# Altium PCB ECE453.PcbDoc
Units mil, origin at the board's own origin, x right, y up, seen from the top; angles counter-clockwise.
Board outline 3937.01 x 3937.01 mil, 2 copper layers (Top Layer, Bottom Layer); 50 components, 33 nets, 116 pads, 68 vias.
Unrouted connection lines stored in the file: 41.
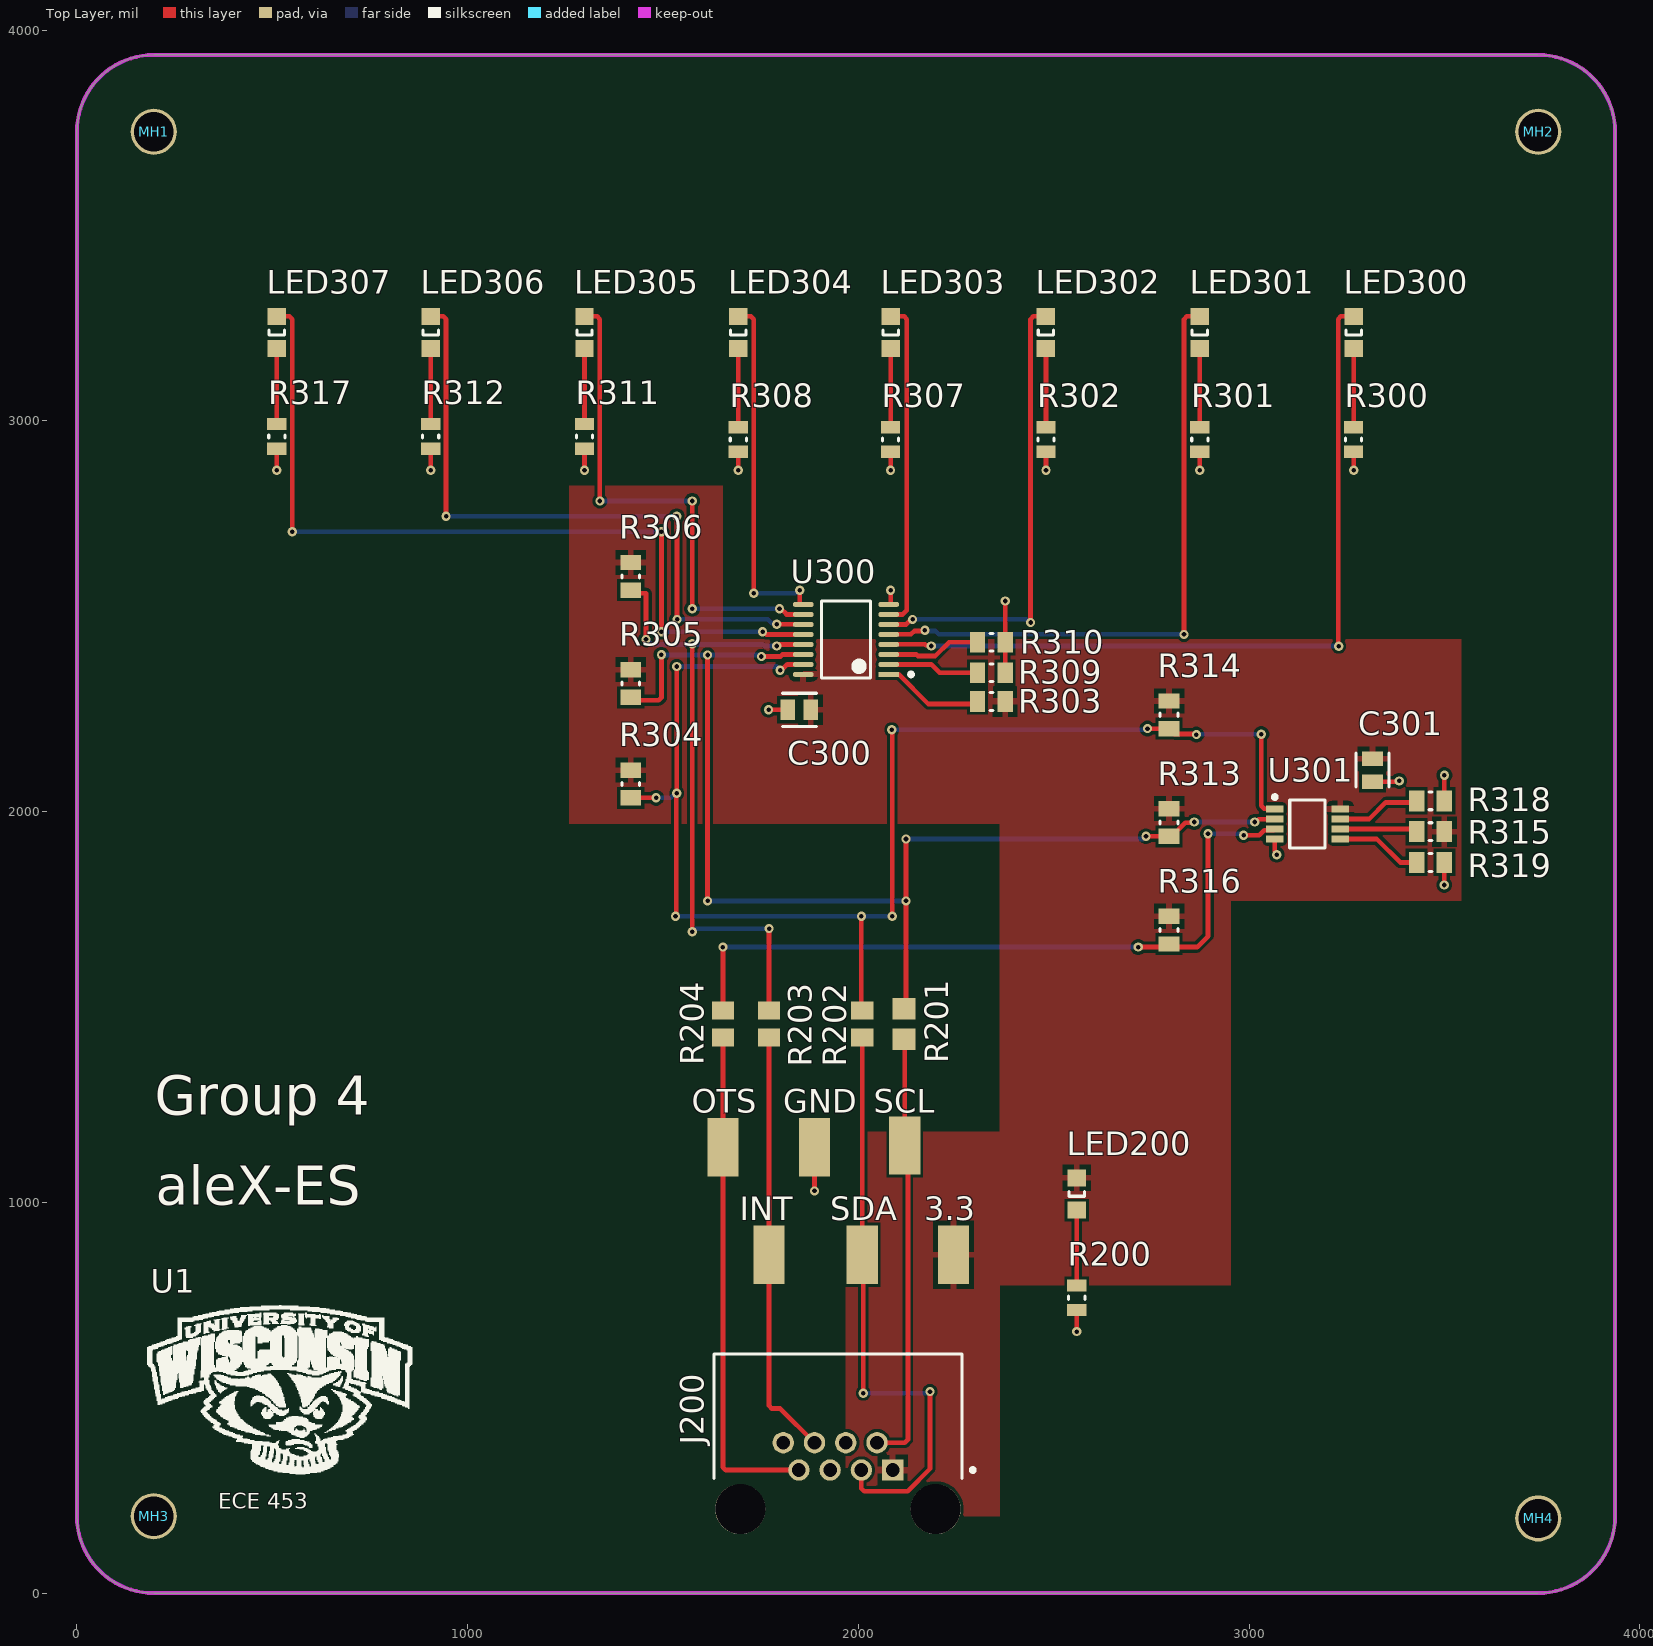
[diagram p0: Top Layer view]
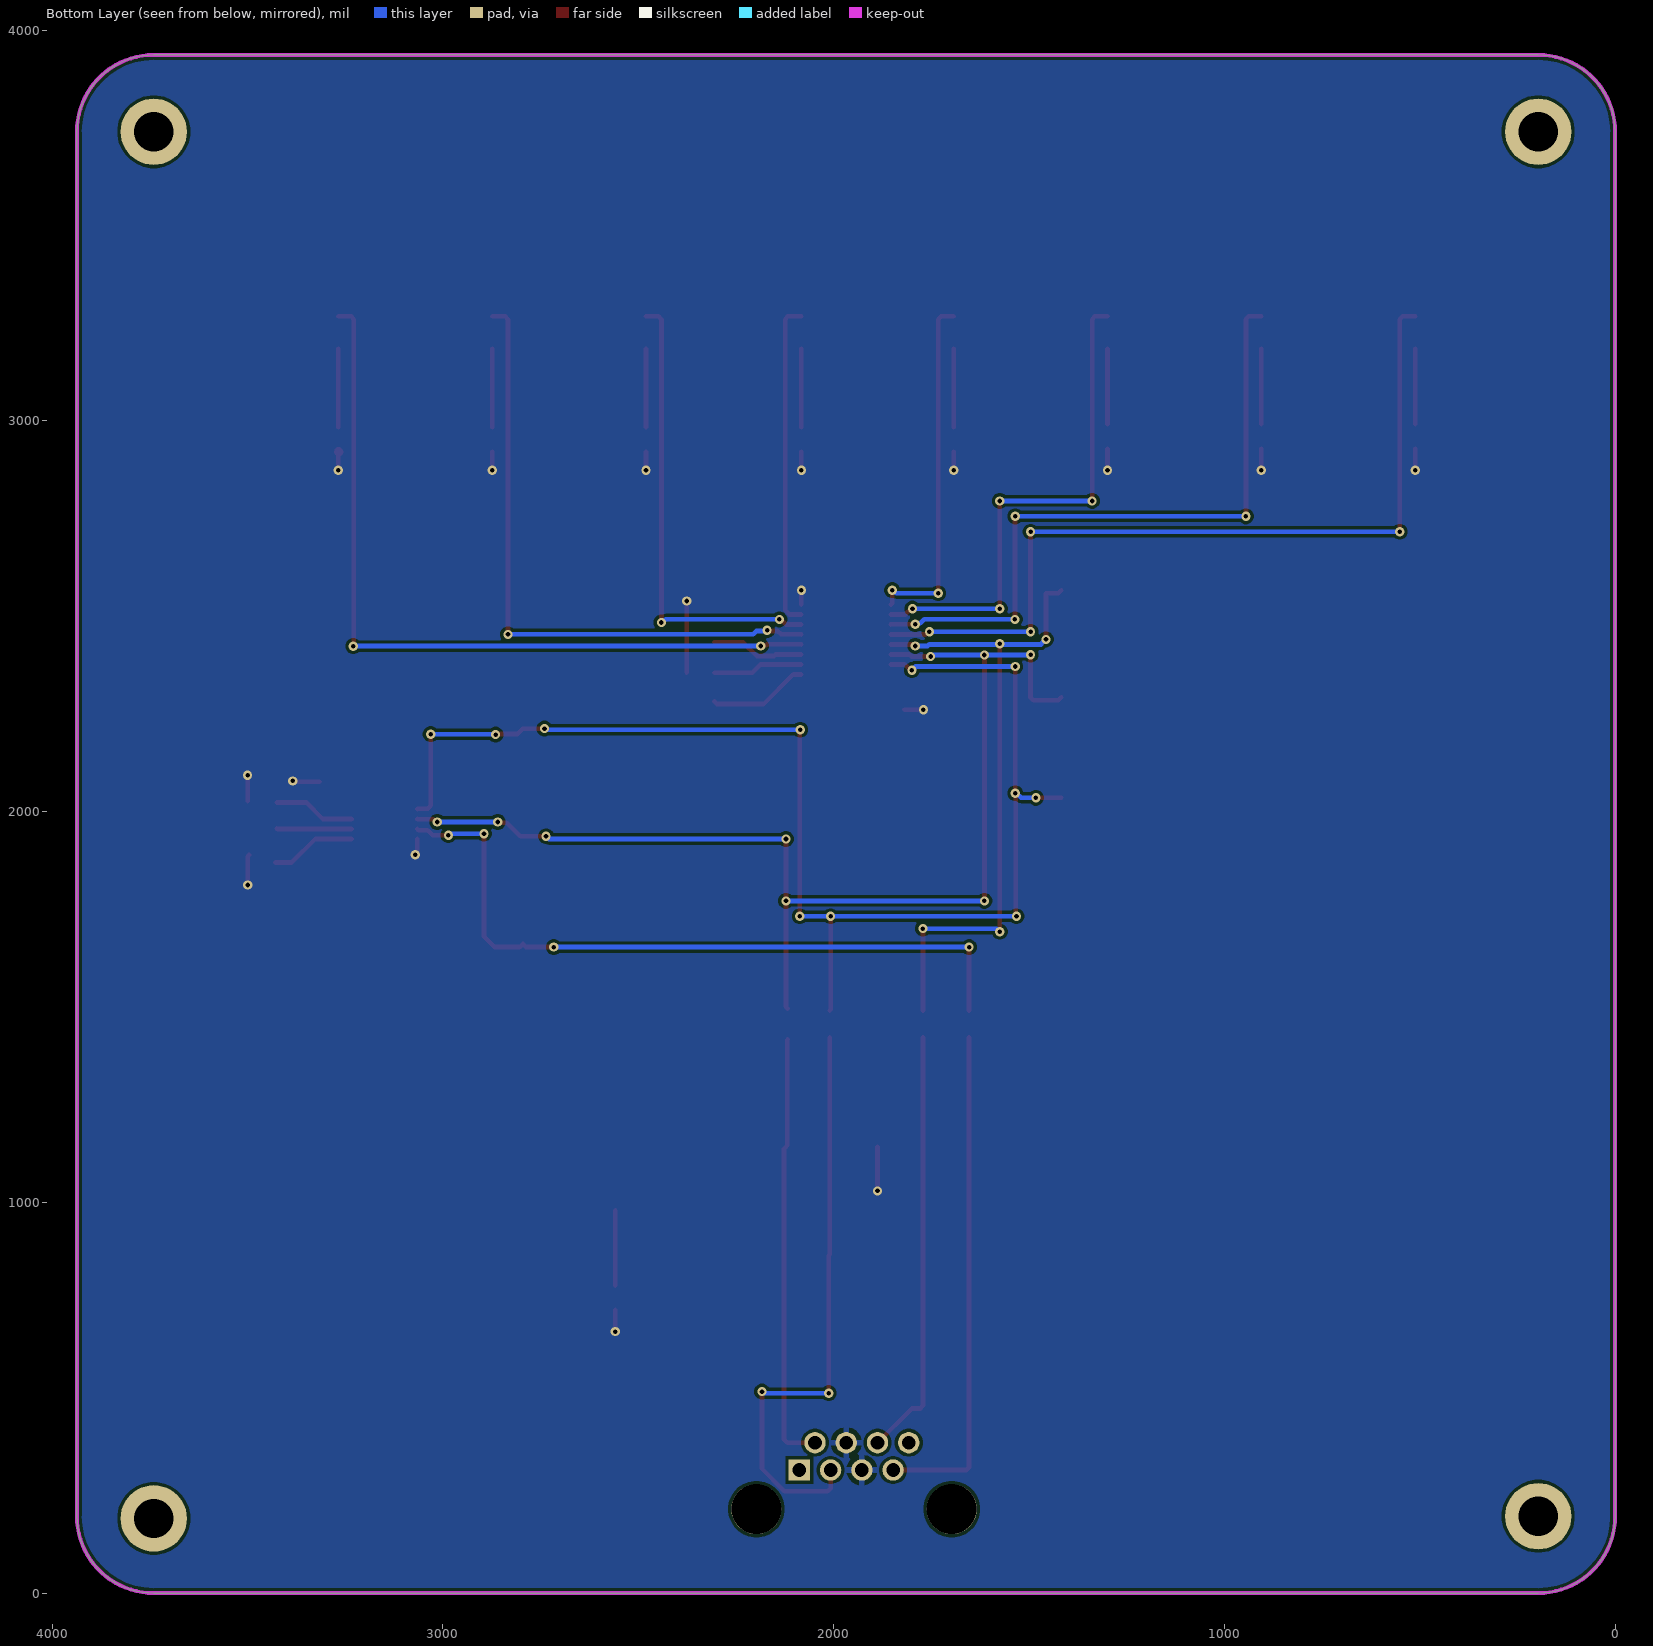
[diagram p1: Bottom Layer view, seen from below]
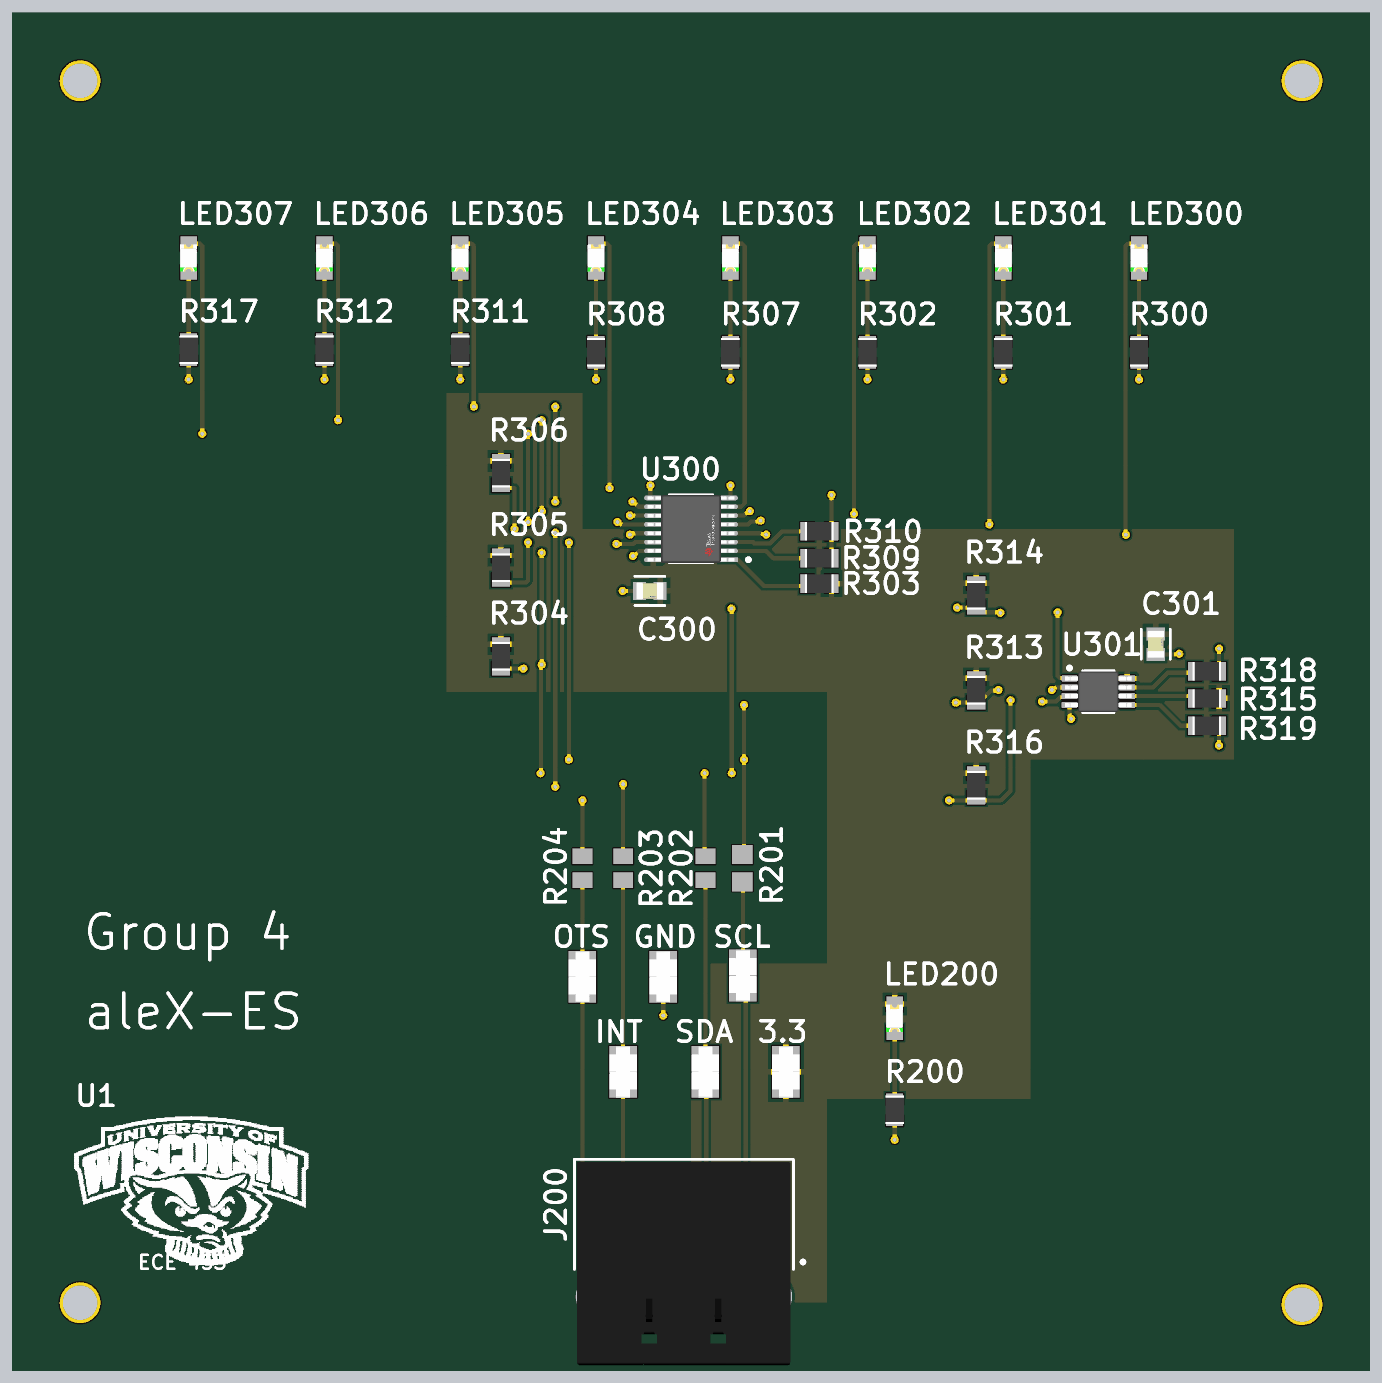
[diagram p2: 3D render of the assembled board from above, using the file's embedded part models]

## Layer stack, top to bottom
Top Solder: solder mask 0.4, Solder Resist, Dk 3.5
Top Layer: signal copper 1.4
Dielectric1: dielectric 12.6, FR-4, Dk 4.8
Bottom Layer: signal copper 1.4
Bottom Solder: solder mask 0.4, Solder Resist, Dk 3.5

## Board outline
0,196.85 ccw(c196.85,196.85) 196.85,0 3740.16,0 ccw(c3740.16,196.85) 3937.01,196.85 3937.01,3740.16 ccw(c3740.16,3740.16) 3740.16,3937.01 196.85,3937.01 ccw(c196.85,3740.16) 0,3740.16

## Design rules (kind name [scope] priority, off if disabled: settings)
Clearance Polygon_Clearance [All vs InPolygon] p1: gap=7.87 ignorepadtopadclearanceinfootprint=FALSE
Clearance [All] p2: gap=7.87 ignorepadtopadclearanceinfootprint=TRUE
ComponentClearance [InComponent('U3')] p1: gap=0 collisioncheckmode=3 verticalgap=10 showdistances=FALSE
Height [All] p1: minheight=0 maxheight=2952.76 prefheight=500
HoleSize [All] p1: absolutevalues=TRUE maxlimit=250 minlimit=11.81 maxpercent=80.000 minpercent=20.000
MinimumAnnularRing [All] p1: minimumring=5.91
MinimumSolderMaskSliver [All] p1: minsoldermaskwidth=8.66
NetAntennae NetAntennae_5.0V [InNet('5.0V')] p1: netantennaetolerance=0
NetAntennae NetAntennae_3.3V [InNet('3.3V')] p2: netantennaetolerance=0
PlaneClearance [All] p1: clearance=11.81
PlaneConnect [All] p1: planeconnectstyle=Relief reliefexpansion=11.81 reliefentries=4 reliefconductorwidth=11.81 reliefairgap=11.81
PolygonConnect ViaConnect [All vs IsVia] p1: connectstyle=Direct reliefconductorwidth=15 reliefentries=4 polygonreliefangle="90 Angle" airgapwidth=10
PolygonConnect [All] p2: connectstyle=Relief reliefconductorwidth=15.75 reliefentries=4 polygonreliefangle="90 Angle" airgapwidth=11.81
RoutingVias [All] p1: holewidth=11.81 width=23.62 viastyle="Through Hole" minholewidth=11.81 minwidth=23.62 maxholewidth=196.85 maxwidth=393.7
SilkToSilkClearance [All] p1: silktosilkclearance=0
SilkToSolderMaskClearance [IsPad] p1: minsilkscreentomaskgap=0 clearancetoexposedcopper=TRUE
SolderMaskExpansion [All] p1: expansion=4 istentingtop=FALSE
UnConnectedPin [All] p1:
Width [All] p1: maxlimit=393.7 minlimit=7.87 preferedwidth=23.62
21 further rules are at their usual default settings.

## Classes and differential pairs
component class 04_Mechanical: MH1 MH2 MH3 MH4 U1

## Components (designator, comment, footprint, x,y, rotation, side; value= is the part's Value field where it differs from the comment)
3.3 "5019" KSTN-5019_V 2243.68,866.14 r90 top
C300 "C0805C104K5RACTU" FP-C0805C-DN-MFG 1849.09,2260.78 r180 top value=100nF
C301 "C0805C104K5RACTU" FP-C0805C-DN-MFG 3316.08,2106.3 r270 top value=100nF
GND "5019" KSTN-5019_V 1887.87,1141.73 r90 top
INT "5019" KSTN-5019_V 1771.65,866.14 r90 top
J200 "RJHSE-5080" FP-RJHSE-5080-MFG 1947.87,309.96 r0 top
LED200 "150080GS75000" 0805_A 2559.06,1021.65 r90 top
LED300 "150080GS75000" 0805_A 3267.72,3226.38 r90 top
LED301 "150080GS75000" 0805_A 2874.02,3226.38 r90 top
LED302 "150080GS75000" 0805_A 2480.31,3226.38 r90 top
LED303 "150080GS75000" 0805_A 2082.68,3226.38 r90 top
LED304 "150080GS75000" 0805_A 1692.91,3226.38 r90 top
LED305 "150080GS75000" 0805_A 1299.21,3226.38 r90 top
LED306 "150080GS75000" 0805_A 905.51,3226.38 r90 top
LED307 "150080GS75000" 0805_A 511.81,3226.38 r90 top
MH1 "MHOLE_2_55MM" MHOLE_2_55MM 196.85,3740.16 r0 top locked
MH2 "MHOLE_2_55MM" MHOLE_2_55MM 3740.16,3740.16 r0 top locked
MH3 "MHOLE_2_55MM" MHOLE_2_55MM 196.85,196.85 r0 top locked
MH4 "MHOLE_2_55MM" MHOLE_2_55MM 3740.16,191.24 r0 top locked
OTS "5019" KSTN-5019_V 1653.54,1141.73 r90 top
R200 "RC0805FR-07330RL" RESC2013X60X35LL10T20 2559.06,755.91 r270 top value=330R
R201 "ERJ-6GEY0R00V" RES_0805 2117.34,1456.69 r90 top value=0R
R202 "ERJ-6GEY0R00V" RESC2013X70X40NL20T20 2010.23,1456.69 r90 top value=0R
R203 "ERJ-6GEY0R00V" RESC2013X70X40NL20T20 1771.65,1456.69 r90 top value=0R
R204 "ERJ-6GEY0R00V" RESC2013X70X40NL20T20 1653.54,1456.69 r90 top value=0R
R300 "RC0805FR-07330RL" RESC2013X60X35LL10T20 3267.72,2952.76 r270 top value=330R
R301 "RC0805FR-07330RL" RESC2013X60X35LL10T20 2874.02,2952.76 r270 top value=330R
R302 "RC0805FR-07330RL" RESC2013X60X35LL10T20 2480.31,2952.76 r270 top value=330R
R303 "RC0805FR-0710KL" RESC2013X60X35NL10T20 2340.48,2281.94 r0 top value=10kR
R304 "RC0805FR-0710KL" RESC2013X60X35NL10T20 1417.32,2070.87 r90 top value=10kR
R305 "RC0805FR-0710KL" RESC2013X60X35NL10T20 1417.32,2328.22 r90 top value=10kR
R306 "RC0805FR-0710KL" RESC2013X60X35NL10T20 1417.32,2602.36 r90 top value=10kR
R307 "RC0805FR-07330RL" RESC2013X60X35LL10T20 2082.68,2952.76 r270 top value=330R
R308 "RC0805FR-07330RL" RESC2013X60X35LL10T20 1692.91,2952.76 r270 top value=330R
R309 "RC0805FR-0710KL" RESC2013X60X35NL10T20 2340.48,2355.78 r180 top value=10kR
R310 "RC0805FR-0710KL" RESC2013X60X35NL10T20 2340.48,2433.71 r180 top value=10kR
R311 "RC0805FR-07330RL" RESC2013X60X35LL10T20 1299.21,2960.63 r270 top value=330R
R312 "RC0805FR-07330RL" RESC2013X60X35LL10T20 905.51,2960.63 r270 top value=330R
R313 "RC0805FR-0710KL" RESC2013X60X35NL10T20 2795.28,1972.44 r90 top value=10kR
R314 "RC0805FR-0710KL" RESC2013X60X35NL10T20 2795.28,2248.03 r90 top value=10kR
R315 "RC0805FR-0710KL" RESC2013X60X35NL10T20 3464.57,1949.05 r0 top value=10kR
R316 "RC0805FR-0710KL" RESC2013X60X35NL10T20 2795.28,1696.85 r90 top value=10kR
R317 "RC0805FR-07330RL" RESC2013X60X35LL10T20 511.81,2960.63 r270 top value=330R
R318 "RC0805FR-0710KL" RESC2013X60X35NL10T20 3464.57,2027.58 r180 top value=10kR
R319 "RC0805FR-0710KL" RESC2013X60X35NL10T20 3464.57,1870.08 r180 top value=10kR
SCL "5019" KSTN-5019_V 2118.95,1145.67 r90 top
SDA "5019" KSTN-5019_V 2010.23,866.14 r90 top
U1 "Bucky" WalkingBucky 472.44,236.22 r0 top
U300 "TCA9534PWR" FP-PW0016A-IPC_C 1968.5,2440.94 r180 top
U301 "LM75AIMME/NOPB" DGK0008A_L 3149.61,1968.5 r0 top

## Footprints (in the part's own frame and the unit in brackets; to place one, negate y for a bottom-side part, rotate by r counter-clockwise, add the part's x,y. Pads: shape width x height; smd on the part's side, far side on the other; paste and mask are expansions set on the pad)
0805_A [mm]
  rect 1.1x1.2 smd: 1(-1.05,0) 2(1.05,0)
  silkscreen extent -0.15,-0.5 0.15,0.5, body extent -1,-0.62 1,0.63, height 0.68
DGK0008A_L [mm] "TSOP, 8-Leads, Body 3.1x3.1mm, Pitch 0.65mm, IPC High Density"
  rrect22% 1.15x0.45 smd: 1(-2.125,0.975) 2(-2.125,0.325) 3(-2.125,-0.325) 4(-2.125,-0.975) 5(2.125,-0.975) 6(2.125,-0.325) 7(2.125,0.325) 8(2.125,0.975)
  silkscreen extent -2.25,-1.55 1.15,1.87, body extent -2.45,-1.5 2.45,1.5, height 0.94
FP-C0805C-DN-MFG [mm]
  rect 0.95x1.35 smd paste+0 mask+0: 1(-0.75,0) 2(0.75,0)
  silkscreen extent -1.1,-1.07 1.1,1.07, body extent -1.4,-0.85 1.4,0.85, height 0.25
FP-PW0016A-IPC_C [mm]
  rect 1.355x0.341 smd paste+0 mask+0: 1(-2.775,2.275)
  rrect100% 1.355x0.341 smd paste+0 mask+0: 2(-2.775,1.625) 3(-2.775,0.975) 4(-2.775,0.325) 5(-2.775,-0.325) 6(-2.775,-0.975) 7(-2.775,-1.625) 8(-2.775,-2.275) 9(2.775,-2.275) 10(2.775,-1.625) 11(2.775,-0.975) 12(2.775,-0.325) 13(2.775,0.325) 14(2.775,0.975) 15(2.775,1.625) 16(2.775,2.275)
  silkscreen extent -4.35,-2.5 1.6,2.5, body extent -3.55,-2.6 3.55,2.6, height 0.25
FP-RJHSE-5080-MFG [mm]
  rect 1.39x1.39 hole 0.89 paste-1000 mask+0: 1(3.556,0.127)
  round 1.39 hole 0.89 paste-1000 mask+0: 2(2.54,1.905) 3(1.524,0.127) 4(0.508,1.905) 5(-0.508,0.127) 6(-1.524,1.905) 7(-2.54,0.127) 8(-3.556,1.905)
  round 3.25 hole 3.25 unplated paste-1000 mask+0: ""(-6.35,-2.413) ""(6.35,-2.413)
  silkscreen extent -8.06,-0.41 8.89,7.68, body extent -8.16,-7.78 8.16,7.78, height 0.25
KSTN-5019_V [mm]
  rect 3.8x2.03 smd: 1(0,0)
  body extent -1.9,-1.01 1.9,1.02, height 2.29
MHOLE_2_55MM [mm]
  round 3 / inner round 4.572 / far side round 4.318 hole 2.55: 1(0,0)
RES_0805 [mm]
  rect 1.4x1.5 smd: 1(-1,0) 2(1,0)
  body extent -1.07,-0.7 1.07,0.7, height 0.7
RESC2013X60X35LL10T20 [mm]
  rect 0.8x1.25 smd: 1(-0.8,0) 2(0.8,0)
  silkscreen extent -0.1,-0.53 0.1,0.53, body extent -1.05,-0.67 1.05,0.68, height 0.6
RESC2013X60X35NL10T20 [mm]
  rect 1x1.35 smd: 1(-0.9,0) 2(0.9,0)
  silkscreen extent -0.1,-0.58 0.1,0.58, body extent -1.05,-0.68 1.05,0.67, height 0.6
RESC2013X70X40NL20T20 [mm]
  rect 1.15x1.45 smd: 1(-0.875,0) 2(0.875,0)
  body extent -1.1,-0.72 1.1,0.72, height 0.7
WalkingBucky [mil]
  silkscreen extent -292,69 386,501

## Part data
3.3 GND INT OTS SCL SDA: library part CMP-1672-00008-1, "Test Point, 1 Position SMD, RoHS, Tape and Reel", Manufacturer="Keystone Electronics", Package Quantity=1, Supplier Part Number=59Y8500, Body Material=Bronze, Category=Connectors, ComponentLink1Description=https://datasheet.ciiva.com/14848/m60-2p61-14848437.pdf?src-supplier=Digi-Key, ComponentLink1URL=https://datasheet.ciiva.com/14848/m60-2p61-14848437.pdf?src-supplier=Digi-Key, ComponentLink2Description=https://datasheet.ciiva.com/14848/m60-2p61-14848438.pdf?src-supplier=Digi-Key, ComponentLink2URL=https://datasheet.ciiva.com/14848/m60-2p61-14848438.pdf?src-supplier=Digi-Key, ComponentLink3Description=https://datasheet.ciiva.com/14848/m60-2p61-14848439.pdf?src-supplier=Digi-Key, ComponentLink3URL=https://datasheet.ciiva.com/14848/m60-2p61-14848439.pdf?src-supplier=Digi-Key, ComponentLink4Description=https://datasheet.ciiva.com/16318/m60-2p61-16318395.pdf?src-supplier=Future+Electronics, ComponentLink4URL=https://datasheet.ciiva.com/16318/m60-2p61-16318395.pdf?src-supplier=Future+Electronics, ComponentLink5Description=https://datasheet.ciiva.com/16885/70182998-16885945.pdf?src-supplier=Allied+Electronics, ComponentLink5URL=https://datasheet.ciiva.com/16885/70182998-16885945.pdf?src-supplier=Allied+Electronics, Contact Material=Bronze, Contact Plating=Silver, Height=0.09inch, Lead Free="Lead Free", Manufacturer Part Number=5019, Material=Bronze, Mounting Technology="Surface Mount,PCB", Packaging="Tape and Reel", Pins=1, Plating=Silver, Pricing="1=0.411, 10=0.389, 25=0.285, 50=0.279, 100=0.273, 250=0.246 (USD)", Reach SVHC Compliant=No, RoHS=Yes, RoHS Compliant=Yes, Series=5019, Stock=11269, Supplier=Newark, Termination=SMD/SMT
C300 C301: library part CMP-2007-00279-2, "CAP CER 0.1UF 50V X7R 0805", Case Code (Imperial)=0805, Case Code (Metric)=2012, Dielectric=X7R, Manufacturer=KEMET, Max Operating Temperature=125°C, Min Operating Temperature=-55°C, Package Quantity=4000, Supplier Part Number=19C6015, Tolerance=10%, Voltage=500V, Voltage Rating=50V, Case/Package=0805, Category="Ceramic Capacitors", ComponentLink1Description=https://datasheet.ciiva.com/32431/slceramic-chip-condensers-e-32431755.pdf?src-supplier=Distrelec, ComponentLink1URL=https://datasheet.ciiva.com/32431/slceramic-chip-condensers-e-32431755.pdf?src-supplier=Distrelec, ComponentLink2Description=Datasheet, ComponentLink2URL=https://content.kemet.com/datasheets/KEM_C1003_C0G_SMD.pdf, ComponentLink3Description=https://datasheet.ciiva.com/28682/1851736-28682232.pdf?src-supplier=Element14, ComponentLink3URL=https://datasheet.ciiva.com/28682/1851736-28682232.pdf?src-supplier=Element14, Construction=Flat, Depth=1.25mm, Height=0.9mm, Lead Pitch=0.75mm, Length=2mm, Manufacturer Part Number=C0805C104K5RACTU, Mounting Technology="Surface Mount,PCB", Packaging="Tape and Reel", Pins=2, Pricing="1=0.024, 25=0.024, 50=0.024, 100=0.024, 250=0.024, 500=0.024, 1000=0.024 (USD)", Radiation Hardening=No, Reach SVHC Compliant=No, RoHS=Yes, RoHS Compliant=Yes, Series="SMD Comm X7R", Stock=3382390, Supplier=Newark, Termination=SMD/SMT, Voltage Rating (DC)=50V, Width=1.2mm
J200: library part CMP-02366-000003-1, "CONN MOD JACK 8P8C R/A UNSHLD", Contact Resistance=20mR, Current Rating=1.5A, Manufacturer=Amphenol, Max Voltage Rating (AC)=125V, Package=CONN_MOD_JACK, Supplier Part Number=28T0105, Temperature="-55°C to +85°C", Temperature Range High=+85°C, Temperature Range Low=-55°C, Automotive=No, Category=Conn, ComponentLink1Description=https://datasheet.ciiva.com/7629/1682821-7629402.pdf?src-supplier=Element14, ComponentLink1URL=https://datasheet.ciiva.com/7629/1682821-7629402.pdf?src-supplier=Element14, ComponentLink2Description=Datasheet, ComponentLink2URL=https://cdn.amphenol-icc.com/media/wysiwyg/files/documentation/datasheet/inputoutput/io-modjack-rjhse.pdf, ComponentLink3Description=https://datasheet.ciiva.com/685/rjhse5080-685586.pdf?src-supplier=Digi-Key, ComponentLink3URL=https://datasheet.ciiva.com/685/rjhse5080-685586.pdf?src-supplier=Digi-Key, ComponentLink4Description=https://datasheet.ciiva.com/1432/1693748-1432448.pdf?src-supplier=Element14, ComponentLink4URL=https://datasheet.ciiva.com/1432/1693748-1432448.pdf?src-supplier=Element14, ComponentLink5Description=https://datasheet.ciiva.com/15171/getdatasheetpartid-643190-15171163.pdf?src-supplier=Verical, ComponentLink5URL=https://datasheet.ciiva.com/15171/getdatasheetpartid-643190-15171163.pdf?src-supplier=Verical, Conn Gender=Female, Conn Orientation="Right Angle", Connector Type=RJ45, Contact Material=Gold,Nickel, Contact Plating=Gold, Depth=14.99mm, Device Class L1=Connectors, Device Class L2="Modular / Ethernet Connectors", Device Class L3=unset, Digikey Description="CONN MOD JACK 8P8C R/A UNSHLD", Footprint Url=https://cdn.amphenol-icc.com/media/wysiwyg/files/drawing/rjhse5080.pdf?__cf_chl_jschl_tk__=e349db0bbbb6188a39347cd5e541b92fa02c9719-1587748343-0-AW7tChdeHzRPLX9gSWj7WrKaXQoY9BsmT9Ek0h-T62M9y3Rs9iypFcOtkzb-6sGYQEjFE-jcoNciDETCOZrh1rYyOesac5SvYLoLwHIsHvF4AKBlx-MXmfZUVk9OTTJLqyQq2qMm0PFRLJpNcK0nrKResqOniRSYixG2sPTmOPraH-ULJFBDL602CHqcI9KKBgTq90Jh1OL2Td4moJ99rFsJRJ1Tk_uoxGe8ublcP_ARu-uLpWcQrBcwOcHDTAwL29DAwVaqcH7ta8Ks7WMlHmVl_pILeEDwT0bE9vu5Pa5S3PtNRF1leuFkgi_FMbUxTDulc5xzbXSfng8srUIV1lWXny5nx1fZJEUa_w97yKjffzBMxiWLWVN-V7-uqAaPbyv_m-wRyw5O25OZNyJOeGU, Gender=Female, Height=0.535inch, Is Female=yes, Lead Free=Yes, Length=15.75mm, Manufacturer Part Number=RJHSE-5080, Max Current Rating=1.5A, Mounting Technology="Through Hole,Panel", Mouser Description="Modular Connectors / Ethernet Connectors R/A RJ45 NONSHIELDED 8 CONT NO LEDS", Number of Contacts=8, Number of Ports=1, Number of Positions=8, Number of Positions Loaded=8, Octopart=https://octopart.com/rjhse-5080-amphenol-45060, Orientation="Right Angle", Packaging=Rail/Tube, Pitch=1.02mm, Pricing="1=0.966, 10=0.854, 25=0.808, 50=0.777, 100=0.748, 250=0.688, 500=0.627, 1000=0.568 (USD)", Radiation Hardening=No, Reach SVHC Compliant=Unknown, RoHS=TRUE, RoHS Compliant=Yes, Stock=8640, Supplier=Newark, Termination=Solder, Voltage Rating=125V, Voltage Rating (DC)=125V
LED200 LED300 LED301 LED302 LED303 LED304 LED305 LED306 LED307: library part CMP-1426-00007-1, "SMD mono-color Chip LED, WL-SMCW, Green", Case Code (Imperial)=0805, Case Code (Metric)=2012, Color=Green, Forward Current=30mA, Forward Voltage=3.2V, Lens Color=Colorless, Manufacturer="Wuerth Elektronik", Manufacturer 1="Wurth Electronics", Max Operating Temperature=85°C, Min Operating Temperature=-40°C, Package Quantity=4000, Supplier Part Number=95W3800, Supplier Part Number 1=732-4983-1-ND, Test Current=20mA, Case/Package=0805, Category=LEDs, ComponentLink1Description="Manufacturer URL", ComponentLink1URL=http://www.we-online.com, ComponentLink2Description=Datasheet, ComponentLink2URL=http://katalog.we-online.com/led/datasheet/150080GS75000.pdf, ComponentLink3Description=https://datasheet.ciiva.com/29563/150080gs75000-29563008.pdf?src-supplier=Digi-Key, ComponentLink3URL=https://datasheet.ciiva.com/29563/150080gs75000-29563008.pdf?src-supplier=Digi-Key, ComponentLink4Description=https://datasheet.ciiva.com/29279/759434-da-01-en-chipled-0805-w-kl-gruen-150080gs75000-29279039.pdf?src-supplier=Conrad, ComponentLink4URL=https://datasheet.ciiva.com/29279/759434-da-01-en-chipled-0805-w-kl-gruen-150080gs75000-29279039.pdf?src-supplier=Conrad, Dominant Wavelength=520nm, Height=0.7mm, Length=2mm, Lens Size=1.25mm, Lens Style=Clear,Rectangular, Lens Transparency=Clear, Luminous Intensity=450mcd, Manufacturer Part Number=150080GS75000, Manufacturer Part Number 1=150080GS75000, Mount="Surface Mount", Mounting Technology="Surface Mount", PackageReference=0805_A, Packaging="Cut Tape", PartNumber=150080GS75000, Pricing="1=0.194, 5=0.194, 10=0.191, 25=0.186, 50=0.18, 100=0.154, 500=0.141 (USD)", Pricing 1="1=0.19000, 50=0.17600, 100=0.15100, 500=0.13100 (USD)", REACH SVHC=Unknown, Reach SVHC Compliant=Unknown, RoHS=Yes, RoHS Compliant=Yes, Series=WL-SMCW, Stock=59977, Stock 1=95801, Supplier=Newark, Supplier 1=Digi-Key, Viewing Angle=140°, Wavelength=520nm, Width=1.25mm
MH1 MH2 MH3 MH4: "Mounting Holde", Manufacturer Part Number="UW MTHOLE"
R200 R300 R301 R302 R307 R308 R311 R312 R317: library part CMP-2000-06960-1, "Chip Resistor, 330 Ohm, +/- 1%, 125 mW, -55 to 155 degC, 0805 (2012 Metric), RoHS, Tape and Reel", Case Code (Imperial)=0805, Case Code (Metric)=2012, Manufacturer=Yageo, Manufacturer Part Number=CRCW0805330RFKEA, Max Operating Temperature=155°C, Max Power Dissipation=125mW, Min Operating Temperature=-55°C, Operating Temperature Range=-55Cto+155C, Package Description="2-Pin Surface Mounted Device, Body 2 x 1.25 mm", Package Quantity=5000, Power Rating=125mW(1/8W), Ratings=AEC-Q200, Resistance=330, Resistance Tolerance=1%, Resistor Type="Thick Film", Supplier Part Number=53K0164, Supplier Part Number 1=311-330CRCT-ND, Temperature Coefficient=100PPM/C, Voltage Rating=150V, Case Code - in=0805, Case Code - mm=2012, Case/Package=0805, Category="Chip SMD Resistors", ComponentLink1Description=https://datasheet.ciiva.com/2457/pyu-r-int-thick-7-2457015.pdf?src-supplier=Digi-Key, ComponentLink1URL=https://datasheet.ciiva.com/2457/pyu-r-int-thick-7-2457015.pdf?src-supplier=Digi-Key, ComponentLink2Description=https://datasheet.ciiva.com/2457/pyu-r-int-thick-7-2457016.pdf?src-supplier=Digi-Key, ComponentLink2URL=https://datasheet.ciiva.com/2457/pyu-r-int-thick-7-2457016.pdf?src-supplier=Digi-Key, ComponentLink3Description=https://datasheet.ciiva.com/2457/pyu-r-int-thick-7-2457014.pdf?src-supplier=Digi-Key, ComponentLink3URL=https://datasheet.ciiva.com/2457/pyu-r-int-thick-7-2457014.pdf?src-supplier=Digi-Key, ComponentLink4Description=https://datasheet.ciiva.com/12667/rc0805-12667925.pdf?src-supplier=Mouser, ComponentLink4URL=https://datasheet.ciiva.com/12667/rc0805-12667925.pdf?src-supplier=Mouser, ComponentLink5Description=https://datasheet.ciiva.com/7941/444164-7941768.pdf?src-supplier=Element14, ComponentLink5URL=https://datasheet.ciiva.com/7941/444164-7941768.pdf?src-supplier=Element14, ComponentLink6Description=https://datasheet.ciiva.com/7941/444164-7941769.pdf?src-supplier=Element14, ComponentLink6URL=https://datasheet.ciiva.com/7941/444164-7941769.pdf?src-supplier=Element14, ComponentLink7Description=https://datasheet.ciiva.com/16740/rc0805-16740975.pdf?src-supplier=Future+Electronics, ComponentLink7URL=https://datasheet.ciiva.com/16740/rc0805-16740975.pdf?src-supplier=Future+Electronics, ComponentLink8Description=https://datasheet.ciiva.com/8944/dcrcwe3-8944773.pdf?src-supplier=Avnet, ComponentLink8URL=https://datasheet.ciiva.com/8944/dcrcwe3-8944773.pdf?src-supplier=Avnet, ComponentLink9Description=https://datasheet.ciiva.com/8944/dcrcwe3-8944776.pdf?src-supplier=Avnet, ComponentLink9URL=https://datasheet.ciiva.com/8944/dcrcwe3-8944776.pdf?src-supplier=Avnet, ComponentLink10Description=https://datasheet.ciiva.com/7777/1697337-7777390.pdf?src-supplier=Element14, ComponentLink10URL=https://datasheet.ciiva.com/7777/1697337-7777390.pdf?src-supplier=Element14, ComponentLink11Description=https://datasheet.ciiva.com/16769/70201119-16769852.pdf?src-supplier=Allied+Electronics, ComponentLink11URL=https://datasheet.ciiva.com/16769/70201119-16769852.pdf?src-supplier=Allied+Electronics, Construction=Rectangular, Contact Plating=Tin, Datasheet URL=http://www.yageo.com/documents/recent/PYu-RC_Group_51_RoHS_L_7.pdf, Datasheet Version="Rev. 7, 05/2017", Depth=1.25mm, Features="Moisture Resistant", Height=0.024inch, Lead Free="Lead Free", Length=0.079inch, Manufacturer 1=Yageo, Manufacturer Part Number 1=RC0805FR-07330RL, Manufacturer URL=http://www.yageo.com/, Military Standard=Not, Mounting Technology=SurfaceMount, Number of Terminations=2, Package Reference=0805, Packaging=Reel, Pricing="1=0.02, 25=0.02, 50=0.02, 100=0.02 (USD)", Pricing 1="1=0.10000, 10=0.03700, 100=0.01510, 1000=0.00680, 2500=0.00590 (USD)", Product=ThickFilmResistorsGeneralPurpose, Reach SVHC Compliant=Unknown, RoHS=Yes, RoHS Compliant=Yes, Series=RC, Size Code=0805, Stock=218356, Stock 1=1297787, Supplier=Newark, Supplier 1=Digi-Key, Termination=SMD/SMT, Termination Style=SMD/SMT, Tolerance=1%, Voltage Rating (DC)=150V, Weight=0.000194oz, Width=0.049inch
R201 R202 R203 R204: library part CMP-1665-00002-5, "Chip Resistor, 0 Ohm, +/- 1%, 0.125 W, -55 to 155 degC, 0805 (2012 Metric), RoHS, Tape and Reel", Case Code (Imperial)=0805, Case Code (Metric)=2012, Current Rating=2A, Manufacturer=Panasonic, Max Operating Temperature="155 degC", Max Power Dissipation=125mW, Min Operating Temperature="-55 degC", Package Quantity=5000, Ratings=AEC-Q200, Resistance="0 Ohm", Resistor Type="Thick Film", Supplier Part Number=65T8846, Temperature Coefficient=600ppm/°C, Tolerance=5%, Voltage Rating=150V, Case/Package=0805, Category="Chip SMD Resistors", ComponentLink1Description="Manufacturer URL", ComponentLink1URL=http://www.panasonic.com/, ComponentLink2Description=Datasheet, ComponentLink2URL=http://industrial.panasonic.com/cdbs/www-data/pdf/RDA0000/AOA0000C84.pdf, Construction=Rectangular, Contact Plating=Tin, DatasheetVersion=03/2015, Depth=1.25mm, Features="Automotive AEC-Q200", Height="0.6 mm", Lead Free="Lead Free", Length="2 mm", Manufacturer Part Number=ERJ-6GEY0R00V, Military Standard=Not, Mounting Technology="Surface Mount", Number of Terminations=2, PackageDescription="2-Pin Surface Mount Device, Body 2 x 1.25 mm", Packaging="Tape and Reel", PartNumber=ERJ-6GEY0R00V, Power Rating=125mW, Pricing="1=0.008, 25=0.008, 50=0.008, 100=0.008, 250=0.008, 500=0.008, 1000=0.008 (USD)", Radiation Hardening=No, REACH SVHC="No SVHC", Reach SVHC Compliant=No, RoHS=Yes, RoHS Compliant=Yes, RoHSCompliant=True, Series=ERJ, Stock=200593, Supplier=Newark, Technology="THICK FILM", Termination=SMD/SMT, Voltage Rating (DC)=150V, Width="1.25 mm"
R303 R304 R305 R306 R309 R310 R313 R314 R315 R316 R318 R319: library part CMP-1659-00013-4, "Chip Resistor, 10 KOhm, +/- 1%, 0.125 W, -55 to 155 degC, 0805 (2012 Metric), RoHS, Tape and Reel", Case Code (Imperial)=0805, Case Code (Metric)=2012, Manufacturer=Yageo, Max Operating Temperature="155 degC", Max Power Dissipation=125mW, Min Operating Temperature="-55 degC", Package Quantity=5000, Resistance=10kR, Resistance Tolerance=1%, Resistor Type="Thick Film", Supplier Part Number=05M4535, Supplier Part Number 1=311-10.0KCRCT-ND, Temperature Coefficient=100ppm/°C, Voltage Rating="150 V", Case/Package=0805, Category="Chip SMD Resistors", ComponentLink1Description="Manufacturer URL", ComponentLink1URL=http://www.yageo.com/, ComponentLink2Description=Datasheet, ComponentLink2URL=http://www.yageo.com/documents/recent/PYu-RC_Group_51_RoHS_L_04.pdf, ComponentLink3Description=https://datasheet.ciiva.com/11808/0900766b8106beab-11808151.pdf?src-supplier=RSComponents, ComponentLink3URL=https://datasheet.ciiva.com/11808/0900766b8106beab-11808151.pdf?src-supplier=RSComponents, ComponentLink4Description=https://datasheet.ciiva.com/46447/444164-46447563.pdf?src-supplier=Element14, ComponentLink4URL=https://datasheet.ciiva.com/46447/444164-46447563.pdf?src-supplier=Element14, ComponentLink5Description=https://datasheet.ciiva.com/2456/pyu-r-int-thick-7-2456973.pdf?src-supplier=Digi-Key, ComponentLink5URL=https://datasheet.ciiva.com/2456/pyu-r-int-thick-7-2456973.pdf?src-supplier=Digi-Key, ComponentLink6Description=https://datasheet.ciiva.com/2456/pyu-r-int-thick-7-2456974.pdf?src-supplier=Digi-Key, ComponentLink6URL=https://datasheet.ciiva.com/2456/pyu-r-int-thick-7-2456974.pdf?src-supplier=Digi-Key, ComponentLink7Description=https://datasheet.ciiva.com/2456/pyu-r-int-thick-7-2456972.pdf?src-supplier=Digi-Key, ComponentLink7URL=https://datasheet.ciiva.com/2456/pyu-r-int-thick-7-2456972.pdf?src-supplier=Digi-Key, ComponentLink8Description=https://datasheet.ciiva.com/12669/rc0805-12669688.pdf?src-supplier=Mouser, ComponentLink8URL=https://datasheet.ciiva.com/12669/rc0805-12669688.pdf?src-supplier=Mouser, ComponentLink9Description=https://datasheet.ciiva.com/16747/rc0805-16747087.pdf?src-supplier=Future+Electronics, ComponentLink9URL=https://datasheet.ciiva.com/16747/rc0805-16747087.pdf?src-supplier=Future+Electronics, ComponentLink10Description=https://datasheet.ciiva.com/11808/0900766b8106beab-11808151.pdf?src-supplier=Rs, ComponentLink10URL=https://datasheet.ciiva.com/11808/0900766b8106beab-11808151.pdf?src-supplier=Rs, Construction=Rectangular, DatasheetVersion="Rev. 4, 02/2016", Depth=1.25mm, Features="Moisture Resistant", Height="0.5 mm", Lead Free="Lead Free", Length="2 mm", Manufacturer 1=Yageo, Manufacturer Part Number=RC0805FR-0710KL, Manufacturer Part Number 1=RC0805FR-0710KL, Military Standard=Not, Mount="Surface Mount", Mounting Technology="Surface Mount", Number of Terminations=2, PackageDescription="2-Pin Surface Mounted Device, Body 2 x 1.25 mm", PackageReference=0805, Packaging="Tape and Reel", Pins=2, Power Rating=125mW, Pricing="1=0.102, 10=0.035, 25=0.028, 50=0.021, 100=0.014 (USD)", Pricing 1="1=0.10000, 10=0.03800, 100=0.01560, 1000=0.00702, 2500=0.00610 (USD)", REACH SVHC="No SVHC", Reach SVHC Compliant=Unknown, RoHS=Yes, RoHS Compliant=Yes, RoHSCompliant=true, Series=RC, Size Code=0805, Stock=346650, Stock 1=5682818, Supplier=Newark, Supplier 1=Digi-Key, Technology="THICK FILM", Termination=SMD/SMT, Tolerance=1%, Width=0.049inch
U1: "Bucky Badger Image", Manufacturer Part Number="UW Bucky"
U300: library part CMP-04886-000003-2, "IC I/O EXPANDER I2C 8B 16TSSOP", Case/Package=TSSOP, Frequency=400kHz, Manufacturer 1="Texas Instruments", Max Operating Temperature=85°C, Min Operating Temperature=-40°C, Supplier Part Number 1=296-40574-1-ND, Category="Interface ICs", ComponentLink1Description=https://datasheet.ciiva.com/48508/tca9534-48508117.pdf?src-supplier=Avnet, ComponentLink1URL=https://datasheet.ciiva.com/48508/tca9534-48508117.pdf?src-supplier=Avnet, Interface=I2C, Lead Free="Lead Free", Manufacturer Part Number 1=TCA9534PWR, Mount="Surface Mount", Number of I/Os=8, Number of Outputs=8, Number of Pins=16, Packaging="Tape and Reel", Pricing 1="1=1.45000, 10=1.29500, 25=1.22880, 100=1.00930, 250=0.94352, 500=0.83380, 1000=0.66240 (USD)", RoHS=Yes, RoHS Compliant=Yes, Stock 1=63981, Supplier 1=Digi-Key
U301: library part CMP-0066-00292-3, "Digital Temperature Sensor and Thermal Watchdog with Two-Wire Interface, 8-pin Mini SOIC, Pb-Free", Manufacturer="Texas Instruments", PackageTopMarking=ZXTT*T00A, PowerWise=N, Code_JEDEC=MO-187-AA, ComponentLink1Description="Datasheet URL", ComponentLink1URL=http://www.ti.com/general/docs/lit/getliterature.tsp?genericPartNumber=LM75A&fileType=pdf, CompType="Temp Sensor IC", PackageDescription="MINI SOIC, .118 x .118 x .034in, 8 Lead, .0256in Pitch", PackageReference=DGK0008A, PinCount=8, RoHS=Y

## Via types
v1: diameter 23.62, hole 11.81, Top Layer to Bottom Layer, 68 vias

## Nets (pads, with @x,y where several pads share a name; then routed paths per layer and width w, separated by ;. In a path a pad name is that pad's centre, name@x,y a point inside that pad or via, vN(x,y) a via of type N, cw(c..) or ccw(c..) an arc to the next point about the centre after c; other vN are vias at no path point)
3.3_LED_OUT: LED200.1 R200.1 | length 192.9
  Top Layer w12: R200.1 LED200.1
3.3V: 3.3.1 C300.1 C301.1 J200.1 LED200.2 R303.2 R304.2 R305.2 R306.2 R313.2 R314.2 R315.2 R316.2 U300.16 U301.8
GND: C300.2 C301.2 GND.1 J200.4 J200.5 R200.2 R300.2 R301.2 R302.2 R307.2 R308.2 R309.1 R310.1 R311.2 R312.2 R317.2 R318.1 R319.1 U300.8 U301.4 | length 1094.8
  Top Layer w12: v1(511.81,2874.02) R317.2 ; v1(905.51,2874.02) R312.2 ; v1(1299.21,2874.02) R311.2 ; v1(1692.91,2874.02) R308.2 ; v1(1770.35,2260.78) C300.2 ; v1(1887.87,1029.53) GND.1 ; U300.8@2082.68,2530.51 v1(2082.68,2566.93) ; v1(2082.68,2874.02) R307.2 ; R309.1 R310.1 v1(2375.91,2539.37) ; v1(2480.31,2874.02) R302.2 ; v1(2559.06,669.29) R200.2 ; v1(2874.02,2874.02) R301.2 ; U301.4 3065.94,1897.83 3070.87,1892.91 v1(3070.87,1889.76) ; R300.2 3267.72,2874.09 v1(3267.79,2874.02) ; C301.2 3382.21,2076.77 v1(3384.25,2078.82) ; R319.1@3496.47,1889.36 3499.64,1886.18 v1(3499.64,1812.52) ; R318.1 v1(3500,2093.49)
  Top Layer w23.62: R300.2@3266.92,2920.46 R300.2
INT: R203.2 R306.1 U300.13 | length 1713.6
  Top Layer w12: R306.1 1425.2,2559.06 1456.69,2559.06 v1(1456.69,2440.94) ; v1(1574.8,1692.91) v1(1574.8,2429.79) ; R203.2 v1(1771.65,1700.79) ; v1(1791.34,2424.14) 1794.48,2424.14 1798.45,2428.1 1854.28,2428.1 U300.13@1854.33,2428.15
  Bottom Layer w12: v1(1456.69,2440.94) 1469.49,2428.15 1755.53,2428.15 1759.54,2424.14 v1(1791.34,2424.14) ; v1(1574.8,1692.91) 1582.68,1700.79 v1(1771.65,1700.79)
INT_MCU: INT.1 J200.6 R203.1 | length 1098.1
  Top Layer w12: R203.1 INT.1 1771.65,479.47 1778.68,472.44 1800.39,472.44 J200.6
IO_A0: R303.1 U300.1 | length 256.4
  Top Layer w12: U300.1@2082.68,2351.38 2103.35,2351.38 2179.13,2275.59 2298.69,2275.59 R303.1
IO_A1: R309.2 U300.2 | length 231.1
  Top Layer w12: U300.2@2082.68,2376.97 2186.76,2376.97 2207.95,2355.78 R309.2
IO_A2: R310.2 U300.3 | length 238.7
  Top Layer w12: U300.3@2082.68,2402.56 2148.14,2402.56 2152.25,2398.45 2197.04,2398.45 2232.3,2433.71 R310.2
OTS: R204.2 R316.1 U301.3 | length 1863.3
  Top Layer w12: R204.2 v1(1653.54,1653.54) ; v1(2716.54,1653.54) 2787.4,1653.54 R316.1 2803.15,1653.54 2866.99,1653.54 2895.17,1681.73 v1(2895.17,1943.83) ; v1(2986.2,1939.92) 3025.77,1939.92 3038.7,1952.85 3063.09,1952.85 U301.3
  Bottom Layer w12: v1(1653.54,1653.54) v1(2716.54,1653.54) ; v1(2895.17,1943.83) 2979.14,1943.83 2983.05,1939.92 v1(2986.2,1939.92)
OTS_MCU: J200.7 OTS.1 R204.1 | length 1297.5
  Top Layer w12: R204.1 OTS.1 1653.54,321.99 1660.57,314.96 J200.7
P0_LED_IN: LED300.2 U300.4 | length 2028.5
  Top Layer w12: U300.4@2082.68,2428.15 2082.77,2428.24 2170.48,2428.24 2172.36,2426.36 2184.18,2426.36 v1(2186.4,2424.14) ; v1(3229.51,2423.73) 3228.35,2424.9 3228.35,3260.69 3235.38,3267.72 LED300.2
  Bottom Layer w12: v1(2186.4,2424.14) 2186.61,2423.94 3229.31,2423.94 v1(3229.51,2423.73)
P0_LED_OUT: LED300.1 R300.1 | length 200.8
  Top Layer w12: R300.1 LED300.1
P1_LED_IN: LED301.2 U300.5 | length 1610.1
  Top Layer w12: U300.5@2082.68,2453.74 2082.77,2453.83 2134.67,2453.83 2143.15,2462.32 2168.25,2462.32 v1(2170.48,2464.55) ; v1(2833.66,2453.74) 2833.66,3260.69 2840.69,3267.72 LED301.2
  Bottom Layer w12: v1(2170.48,2464.55) 2172.7,2462.32 2197.8,2462.32 2206.29,2453.83 2833.57,2453.83 v1(2833.66,2453.74)
P1_LED_OUT: LED301.1 R301.1 | length 200.8
  Top Layer w12: R301.1 LED301.1
P2_LED_IN: LED302.2 U300.6 | length 1185.6
  Top Layer w12: U300.6@2082.68,2479.33 2122.87,2479.33 2135.74,2492.19 v1(2138.88,2492.19) ; v1(2440.94,2484.23) 2440.94,3260.69 2447.97,3267.72 LED302.2
  Bottom Layer w12: v1(2138.88,2492.19) 2429.84,2492.19 2437.8,2484.23 v1(2440.94,2484.23)
P2_LED_OUT: LED302.1 R302.1 | length 200.8
  Top Layer w12: R302.1 LED302.1
P3_LED_IN: LED303.2 U300.7 | length 835.6
  Top Layer w12: U300.7@2082.68,2504.92 2113.95,2504.92 2124.09,2515.06 2124.09,3260.69 2117.06,3267.72 LED303.2
P3_LED_OUT: LED303.1 R307.1 | length 200.8
  Top Layer w12: R307.1 LED303.1
P4_LED_IN: LED304.2 U300.9 | length 904
  Top Layer w12: LED304.2 1725.25,3267.72 1732.28,3260.69 v1(1732.28,2559.06) ; v1(1850.39,2566.93) 1850.39,2533.37 1853.25,2530.51 U300.9@1854.33,2530.51
  Bottom Layer w12: v1(1732.28,2559.06) 1839.37,2559.06 1847.25,2566.93 v1(1850.39,2566.93)
P4_LED_OUT: LED304.1 R308.1 | length 200.8
  Top Layer w12: R308.1 LED304.1
P5_LED_IN: LED305.2 U300.10 | length 1305.1
  Top Layer w12: LED305.2 1331.55,3267.72 1338.58,3260.69 v1(1338.58,2795.28) ; v1(1574.8,2519.68) v1(1574.8,2795.28) ; v1(1798.45,2519.68) 1801.59,2519.68 1816.35,2504.92 U300.10@1854.33,2504.92
  Bottom Layer w12: v1(1338.58,2795.28) v1(1574.8,2795.28) ; v1(1574.8,2519.68) v1(1798.45,2519.68)
P5_LED_OUT: LED305.1 R311.1 | length 192.9
  Top Layer w12: R311.1 LED305.1
P6_LED_IN: LED306.2 U300.11 | length 1725.1
  Top Layer w12: LED306.2 937.85,3267.72 944.88,3260.69 v1(944.88,2755.91) ; v1(1535.43,2755.91) 1535.8,2755.54 1535.8,2492.56 v1(1536.16,2492.19) ; v1(1791.34,2479.76) 1791.55,2479.54 1854.12,2479.54 U300.11@1854.33,2479.33
  Bottom Layer w12: v1(944.88,2755.91) v1(1535.43,2755.91) ; v1(1536.16,2492.19) 1768.03,2492.19 1778.24,2481.98 1789.11,2481.98 v1(1791.34,2479.76)
P6_LED_OUT: LED306.1 R312.1 | length 192.9
  Top Layer w12: R312.1 LED306.1
P7_LED_IN: LED307.2 U300.12 | length 2148.3
  Top Layer w12: LED307.2 544.15,3267.72 551.18,3260.69 v1(551.18,2716.54) ; v1(1496.06,2460.63) v1(1496.06,2716.54) ; v1(1754.97,2460.63) 1758.11,2460.63 1765,2453.74 U300.12@1854.33,2453.74
  Bottom Layer w12: v1(551.18,2716.54) v1(1496.06,2716.54) ; v1(1496.06,2460.63) v1(1754.97,2460.63)
P7_LED_OUT: LED307.1 R317.1 | length 192.9
  Top Layer w12: R317.1 LED307.1
SCL: R201.2 R305.1 R313.1 U300.14 U301.2 | length 3095.3
  Top Layer w12: R305.1 1425.2,2284.92 1489.03,2284.92 1496.06,2291.95 v1(1496.06,2401.57) ; v1(1614.17,1771.65) v1(1614.17,2401.13) ; v1(1751.97,2397.22) 1800.74,2397.22 1805.89,2402.37 1854.14,2402.37 U300.14@1854.33,2402.56 ; R201.2 2122.19,1500.92 v1(2122.19,1771.65) v1(2122.19,1930.12) ; v1(2736.22,1937.01) 2802.17,1937.01 2836.55,1971.39 2857.63,1971.39 v1(2859.86,1973.62) ; v1(3014.81,1973.62) 3017.95,1973.62 3025.31,1980.97 3065.62,1980.97 U301.2
  Bottom Layer w12: v1(1496.06,2401.57) 1501.01,2401.57 1501.43,2401.15 1744.89,2401.15 1748.82,2397.22 v1(1751.97,2397.22) ; v1(1614.17,1771.65) v1(2122.19,1771.65) ; v1(2122.19,1930.12) 2729.33,1930.12 v1(2736.22,1937.01) ; v1(2859.86,1973.62) v1(3014.81,1973.62)
SCL_MCU: J200.2 R201.1 SCL.1 | length 1110.8
  Top Layer w12: J200.2 2118.95,384.96 2127.05,393.05 2127.05,1137.58 SCL.1 2118.95,1415.71 R201.1
SDA: R202.2 R304.1 R314.1 U300.15 U301.1 | length 3542
  Top Layer w12: R304.1 v1(1482.53,2035.43) ; v1(1532.24,1732.28) 1533.84,1733.88 1533.84,2045.65 v1(1535.43,2047.24) v1(1535.43,2371.53) ; v1(1799.87,2362.2) 1803.02,2362.2 1817.78,2376.97 U300.15@1854.33,2376.97 ; v1(2007.87,1732.28) 2007.87,1493.5 R202.2 ; v1(2085.54,2209.65) 2086.61,2208.57 v1(2086.61,1732.28) ; v1(2740.14,2212.6) R314.1 2808.96,2198.91 2863.9,2198.91 v1(2865.39,2197.42) ; v1(3031.5,2198.49) 3031.5,2014.9 3038.53,2007.87 3064.96,2007.87 U301.1
  Bottom Layer w12: v1(1482.53,2035.43) 1520.48,2035.43 1532.29,2047.24 v1(1535.43,2047.24) ; v1(1532.24,1732.28) v1(2007.87,1732.28) v1(2086.61,1732.28) ; v1(1535.43,2371.53) 1790.55,2371.53 v1(1799.87,2362.2) ; v1(2085.54,2209.65) 2731.3,2209.65 2732.03,2210.37 2737.91,2210.37 v1(2740.14,2212.6) ; v1(2865.39,2197.42) 2866.47,2198.49 v1(3031.5,2198.49)
SDA_MCU: J200.3 R202.1 SDA.1 | length 1531.2
  Top Layer w12: J200.3 2007.87,267.79 2014.9,260.76 2126.36,260.76 2183.53,317.92 v1(2183.53,515.73) ; R202.1 SDA.1 2012.51,863.86 v1(2012.51,511.81)
  Bottom Layer w12: v1(2012.51,511.81) 2176.46,511.81 2180.38,515.73 v1(2183.53,515.73)
TP_A0: R318.2 U301.7 | length 209.7
  Top Layer w12: U301.7@3233.43,1981.13 U301.7 3308.07,1981.3 3350.49,2023.72 R318.2@3425.2,2023.72
TP_A1: R315.1 U301.6 | length 192.4
  Top Layer w12: U301.6 3423.98,1955.71 R315.1@3425.2,1956.93
TP_A2: R319.2 U301.5 | length 220.7
  Top Layer w12: U301.5 3327.21,1930.12 3387.25,1870.08 R319.2
pads on no net: J200. J200.8 MH1.1 MH2.1 MH3.1 MH4.1

## Polygon pours and split planes (outlines as drawn)
GND on Bottom Layer "B_GND" (solid, remove dead copper, pour order 7): -39.37,3976.38 3976.38,3976.38 3976.38,-39.37 -78.74,-39.37
3.3V on Top Layer "T_3V3" (solid, remove dead copper, pour order 6): 1259.84,2834.65 1653.54,2834.65 1653.54,2440.94 3543.31,2440.94 3543.31,1771.65 2952.76,1771.65 2952.76,787.4 2362.2,787.4 2362.2,196.85 1967.87,196.85 1967.87,1182.97 1968.5,1183.6 1971,1181.1 2362.2,1181.1 2362.2,1968.5 1259.84,1968.5

## Keep-outs
Keep-Out Layer:
  the board outline again, w10

## Silkscreen, mask and mechanical layers (free items; w line width, h text height)
Top Overlay:
  text "Group 4" at 199.54,1224.43 h100
  text "aleX-ES" at 202.44,994.25 h100
Mechanical 2:
  lines w10: 196.85,0 cw(c196.85,196.85) 0,196.85 0,3740.16 cw(c196.85,3740.16) 196.85,3937.01 3740.16,3937.01 cw(c3740.16,3740.16) 3937.01,3740.16 3937.01,196.85 cw(c3740.16,196.85) 3740.16,0 196.85,0 ; 196.85,0 196.85,0

## Text inside footprints (layer, text, board x,y; h text height)
U1: Top Overlay "ECE 453" at 362.44,216.22 h40